# Altium PCB Ldo_Reg.PcbDoc
Units mm, origin at the board's own origin, x right, y up, seen from the top; angles counter-clockwise.
Board outline 9.4 x 5.33 mm, 2 copper layers (Top Layer, Bottom Layer); 3 components, 3 nets, 13 pads, 0 vias.
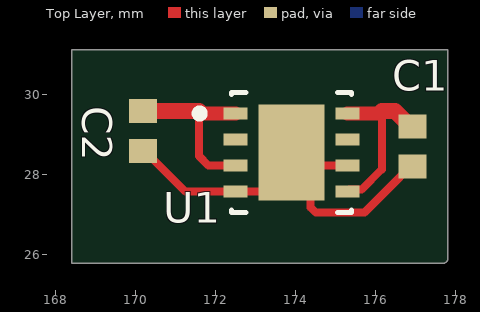
[diagram p0: Top Layer view]
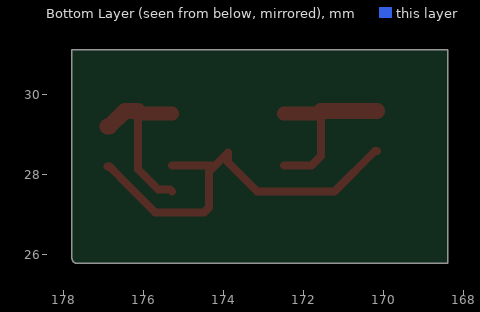
[diagram p1: Bottom Layer view, seen from below]
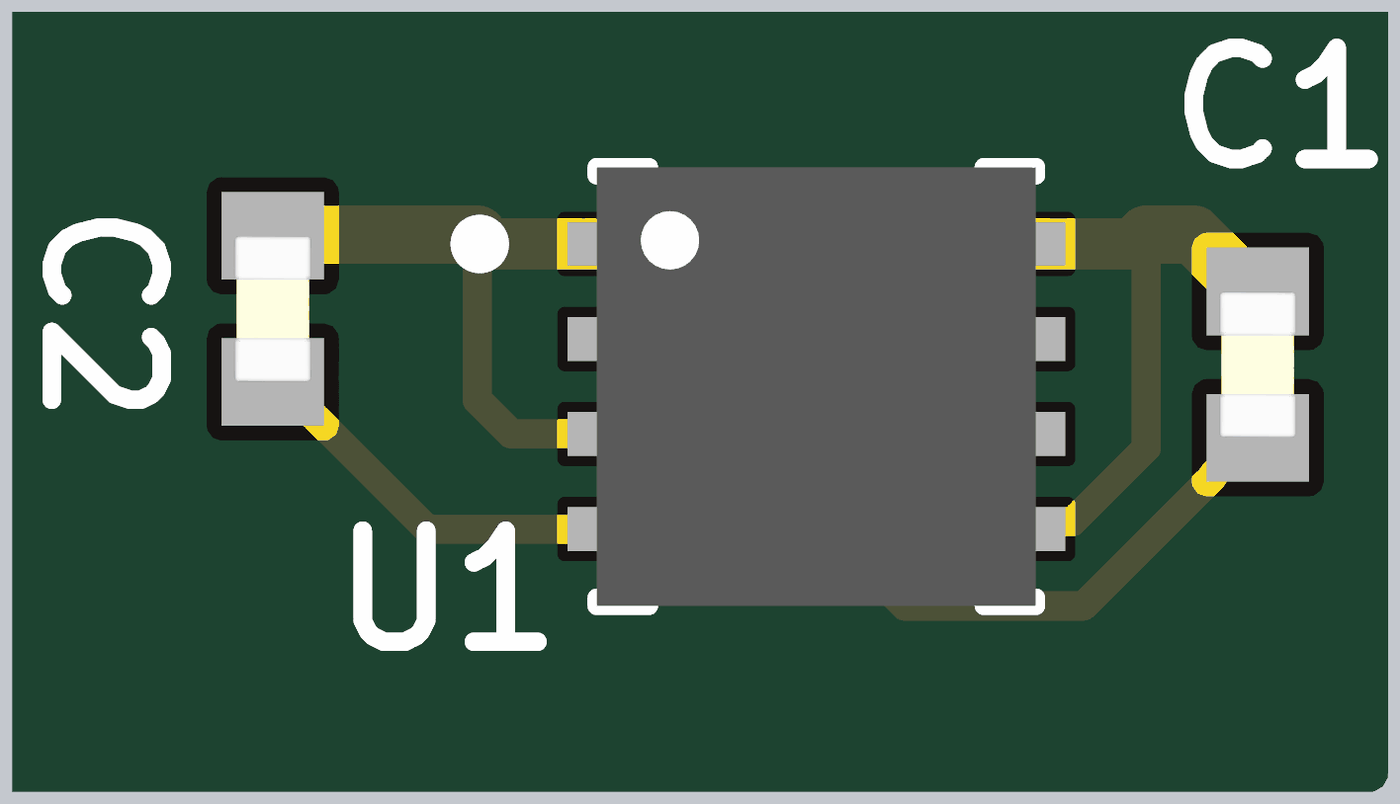
[diagram p2: 3D render of the assembled board from above, using the file's embedded part models]

## Layer stack, top to bottom
Top Solder: solder mask 0.0102, Solder Resist, Dk 3.5
Top Layer: signal copper 0.0356
Dielectric 1: dielectric 0.32, FR-4, Dk 4.8
Bottom Layer: signal copper 0.0356
Bottom Solder: solder mask 0.0102, Solder Resist, Dk 3.5

## Board outline
168.402,25.781 177.673,25.781 ccw(c177.673,25.908) 177.8,25.908 177.8,31.115 168.402,31.115

## Design rules (kind name [scope] priority, off if disabled: settings)
Clearance [All] p1: gap=0.254 ignorepadtopadclearanceinfootprint=FALSE except(0: Arc-Hole Track-Hole SMDPad-Hole THPad-Hole Via-Hole Fill-Hole Poly-Hole Region-Hole Text-Hole)
PolygonConnect [All] p1: connectstyle=Relief reliefconductorwidth=0.254 reliefentries=4 polygonreliefangle="90 Angle" airgapwidth=0.254
RoutingVias [All] p1: holewidth=0.711 width=1.27 viastyle="Through Hole" minholewidth=0.711 minwidth=1.27 maxholewidth=0.711 maxwidth=1.27
SolderMaskExpansion [All] p1: expansion=0.102 istentingtop=FALSE
Width [All] p1: maxlimit=1 minlimit=0.15 preferedwidth=0.15
30 further rules are at their usual default settings.

## Components (designator, comment, footprint, x,y, rotation, side; value= is the part's Value field where it differs from the comment)
C1 "2u2" CAP_0402 176.911,28.702 r270 top
C2 "2u2" CAP_0402 170.18,29.083 r270 top
U1 "TPS73501QDRBRQ1" VSON-8 173.017,28.823 r0 top

## Footprints (in the part's own frame and the unit in brackets; to place one, negate y for a bottom-side part, rotate by r counter-clockwise, add the part's x,y. Pads: shape width x height; smd on the part's side, far side on the other; paste and mask are expansions set on the pad)
CAP_0402 [mm]
  rect 0.6x0.7 smd: 1(0.5,0) 2(-0.5,0)
  body extent -0.5,-0.27 0.5,0.27, height 0.35
VSON-8 [mm]
  rect 0.6x0.3 smd mask+0.05: 1(-0.523,0.704) 2(-0.523,0.054) 3(-0.523,-0.596) 4(-0.523,-1.246) 5(2.277,-1.246) 6(2.277,-0.596) 7(2.277,0.054) 8(2.277,0.704)
  rect 1.65x2.4 smd paste-2 mask+0.05: 9(0.877,-0.271)
  silkscreen extent -1.52,-1.77 2.38,1.23, body extent -0.62,-1.77 2.38,1.23, height 1

## Part data
C1 C2: library part CAP_0402_16V, "Capacitor SMD 0402 16V"
U1: "LDO Regulator Pos 1.25V to 6V 0.5A Automotive 8-Pin VSON EP T/R", Case/Package=SON, Dropout Voltage=280mV, Manufacturer="Texas Instruments", Max Operating Temperature=125°C, Max Input Voltage=6.5V, Min Current Limit=800mA, Min Operating Temperature=-40°C, Output Current=500mA, Output Voltage=6V, Package Quantity=3000, Supplier Part Number 1=296-40952-1-ND, Category="Voltage Regulators - Linear", ComponentLink1Description=http://www.ti.com/lit/ds/symlink/tps735-q1.pdf?src-supplier=Digi-Key, ComponentLink1URL=http://www.ti.com/lit/ds/symlink/tps735-q1.pdf?src-supplier=Digi-Key, ComponentLink2Description=http://www.ti.com/general/docs/suppproductinfo.tsp?distId=10&amp;gotoUrl=http%3A%2F%2Fwww.ti.com%2Flit%2Fgpn%2Ftps735-q1&src-supplier=Digi-Key, ComponentLink2URL=http://www.ti.com/general/docs/suppproductinfo.tsp?distId=10&amp;gotoUrl=http%3A%2F%2Fwww.ti.com%2Flit%2Fgpn%2Ftps735-q1&src-supplier=Digi-Key, ComponentLink3Description=http://www.ti.com/lit/gpn/tps735-q1?src-supplier=Mouser, ComponentLink3URL=http://www.ti.com/lit/gpn/tps735-q1?src-supplier=Mouser, ComponentLink4Description=http://www.ti.com/general/docs/lit/getliterature.tsp?genericPartNumber=TPS735-Q1&&fileType=pdf&src-supplier=Avnet, ComponentLink4URL=http://www.ti.com/general/docs/lit/getliterature.tsp?genericPartNumber=TPS735-Q1&&fileType=pdf&src-supplier=Avnet, Lead Free="Lead Free", Manufacturer Part Number=TPS73501QDRBRQ1, Mount="Surface Mount", Number of Outputs=1, Number of Pins=8, Number of Regulators=1, Output Type=Adjustable, Packaging="Tape and Reel", Pricing 1="1=1,87, 10=1,679, 25=1,5836, 100=1,3492, 250=1,26688, 500=1,10854, 1000=0,9185 (USD)", RoHS=Yes, RoHS Compliant=Yes, Series="Automotive, AEC-Q100", Stock 1=879, Supplier 1=Digi-Key, Weight=0.002677oz

## Nets (pads, with @x,y where several pads share a name; then routed paths per layer and width w, separated by ;. In a path a pad name is that pad's centre, name@x,y a point inside that pad or via, vN(x,y) a via of type N, cw(c..) or ccw(c..) an arc to the next point about the centre after c; other vN are vias at no path point)
+3V3: C2.2 U1.1 U1.3 | length 4.5
  Top Layer w0.2: 171.577,29.591 171.577,28.462 171.811,28.227 U1.3
  Top Layer w0.35: 171.577,29.591 171.641,29.527 U1.1
  Top Layer w0.4: C2.2 170.188,29.591 171.577,29.591
GND: C1.1 C2.1 U1.4 U1.6 U1.9 | length 10.4
  Top Layer w0.2: C2.1 170.23,28.583 171.236,27.577 U1.4 173.169,27.577 173.894,28.302 U1.9 U1.9@174.219,28.227 ; U1.6 U1.9@174.219,28.227 ; C1.1 176.861,28.202 176.603,27.944 176.603,27.935 175.719,27.051 174.498,27.051 174.371,27.178 174.371,28.075 U1.9@174.219,28.227
VIN: C1.2 U1.5 U1.8 | length 4.3
  Top Layer w0.2: U1.5 175.344,27.627 175.645,27.627 176.149,28.131 176.149,29.591
  Top Layer w0.35: U1.8 176.085,29.527 176.149,29.591
  Top Layer w0.4: 176.149,29.591 176.472,29.591 176.861,29.202 C1.2
pads on no net: U1.2 U1.7